# EAGLE board SparkFun-Blynk-Board-ESP8266_Panel_v10a (EAGLE 7.5.0), part 1 of 7
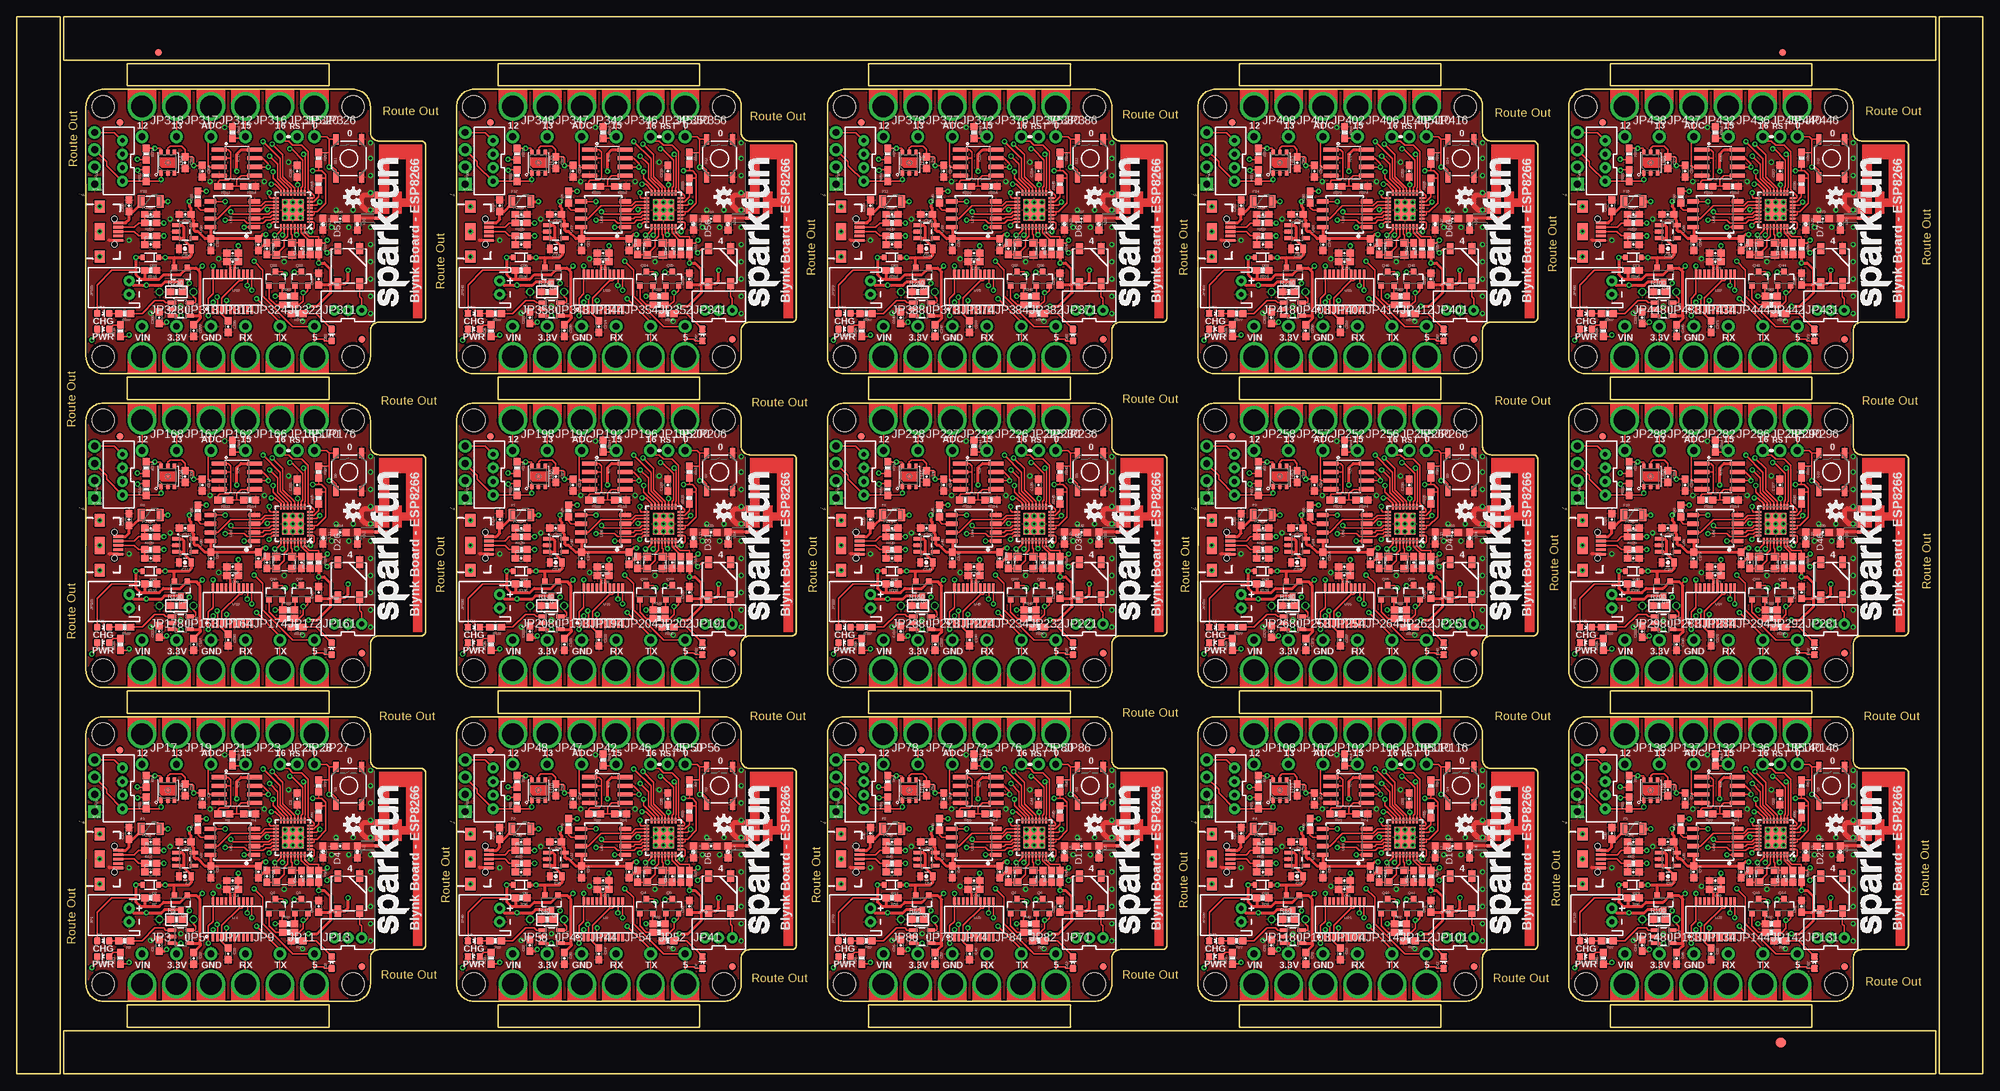
[diagram p0: board, top side]
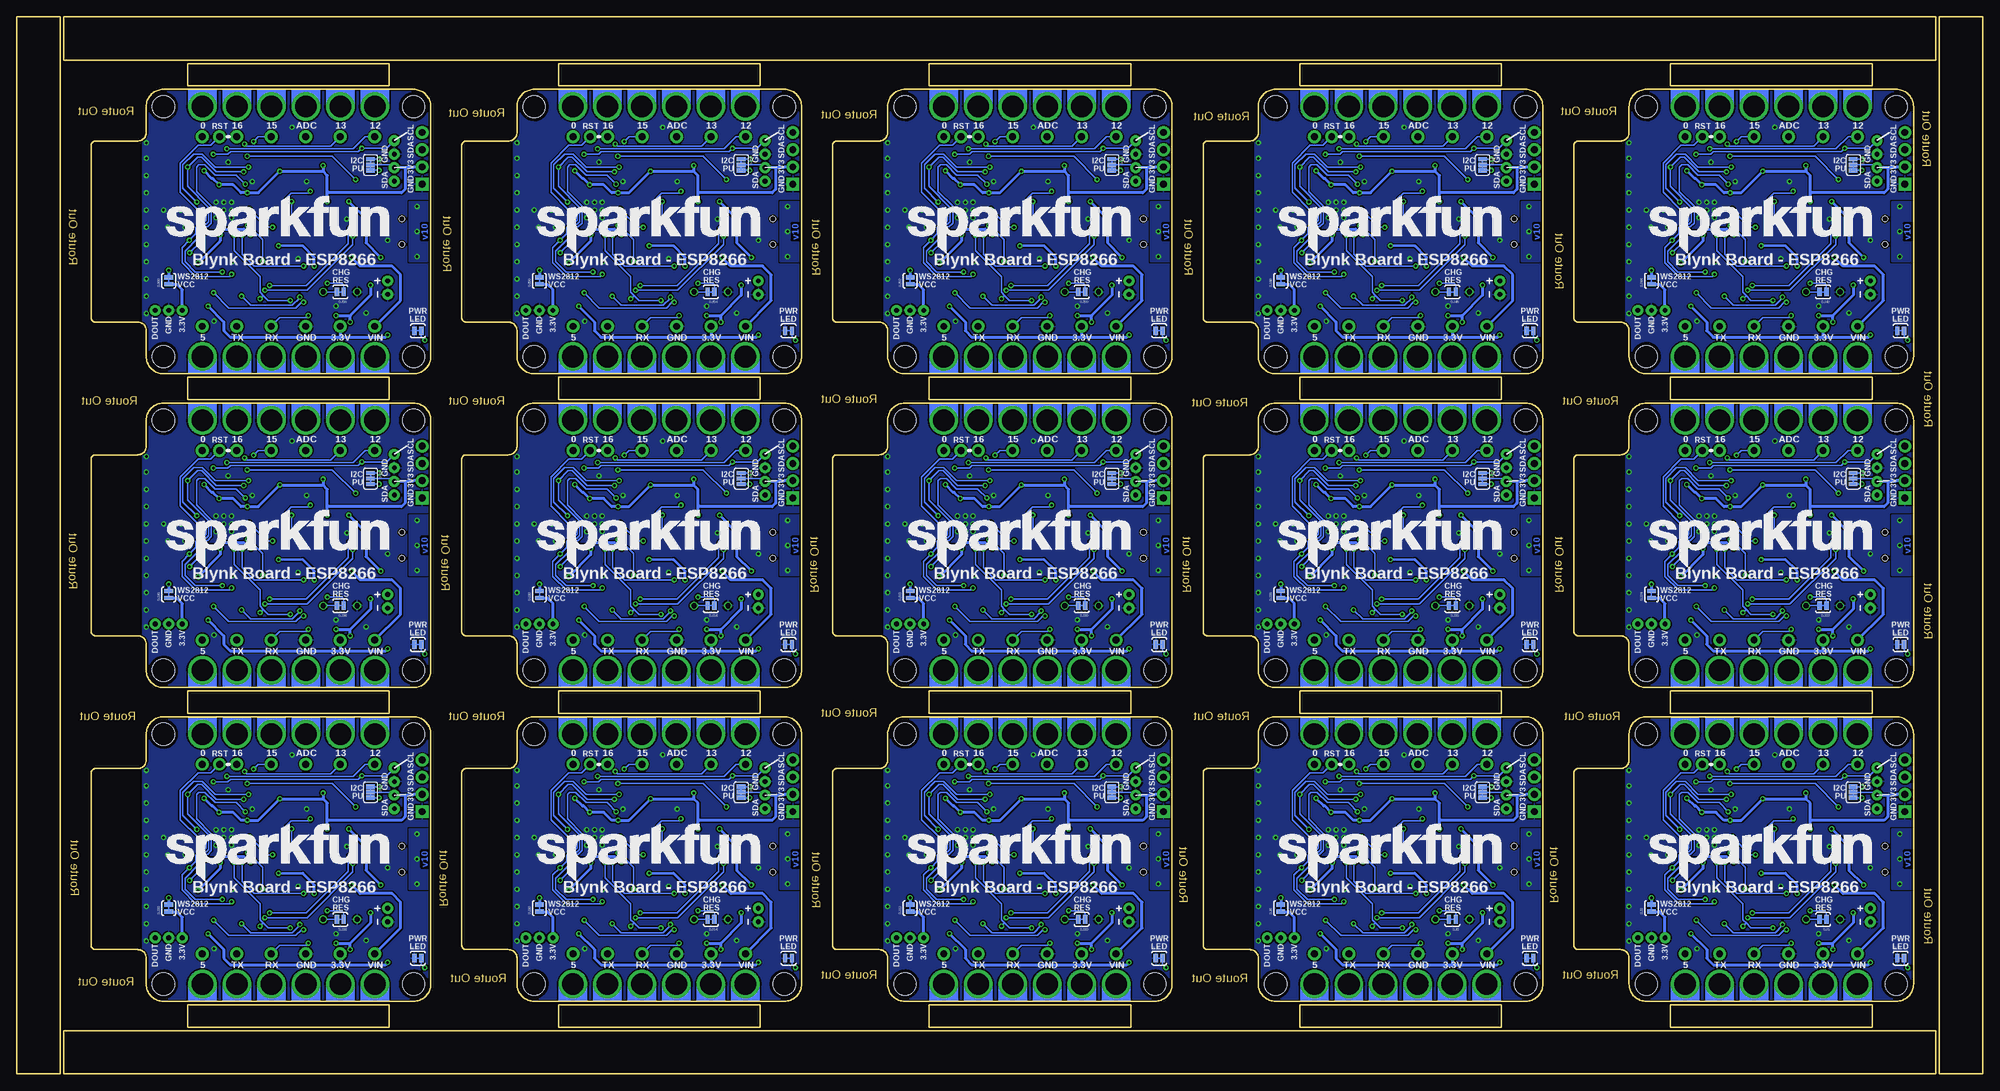
[diagram p1: board, bottom side, seen from below]

Size 289.56 x 155.7 mm. Coordinates in mm from the lower left corner, seen from the top.
Outline: 344 segments
Copper layers (1*16): Top 0.035mm / dielectric 1.5mm / Bottom 0.035mm
Design rules "SparkFun-2-layer-TIGHT": minimum track width 7mil, minimum drill 15mil, track to track 7mil, track to pad 7mil, pad to pad 7mil, via to via 7mil, smd to smd 7mil, copper to edge 7mil, drill to drill 7mil, minimum pad ring 7mil, minimum via ring 7mil, stop-mask expansion 4mil, vias tented up to drill 20mil, thermal gap 10mil

## Footprints (pad centres in the part's own frame; a part is rotated, then mirrored left to right if it is on the bottom)
0603-CAP = smd 1.1 x 1: 1 -0.85,0; 2 0.85,0
0805-CAP = smd 0.8 x 1.2: 1 -0.9,0; 2 0.9,0
LED-0603 = smd 1 x 1: A 0,-0.877; C 0,0.877
SOD-323 = smd 0.63 x 0.83: A 1.15,0; C -1.15,0
WS2812B = smd 1.651 x 1: 1 -2.577,1.6; 2 -2.577,-1.6; 3 2.577,-1.6; 4 2.577,1.6
TRACE_ANTENNA_2.4GHZ_25.7MM = smd 0.46 x 0.46: ANT 0,0.23 | smd 1 x 0.46: GND -1.18,0.23; GND2 -3.38,0.23
FIDUCIAL-1.5X3 = smd 1.5 x 1.5: 1 0,0
FIDUCIAL-1X2 = smd 1 x 1: 1 0,0
PTC-1206 = smd 1 x 1.8: 1 -1.4,0; 2 1.4,0
SO08 = smd 0.61 x 2.21: 1 -1.905,-2.616; 2 -0.635,-2.616; 3 0.635,-2.616; 4 1.905,-2.616; 5 1.905,2.616; 6 0.635,2.616; 7 -0.635,2.616; 8 -1.905,2.616
JST-2-PTH = drill 0.7 pad 1.6: 1 -1,0; 2 1,0
1X01_ALLIGATOR_3MM_HALF = drill 3.175: 1@2 0,0
1X01_NO_SILK = drill 1.016 pad 1.88: 1 0,0
JST-3-PTH-VERT = drill 0.7 pad 1.6: 1 -2,-0.55; 2 0,-0.55; 3 2,-0.55
USB-B-MICRO-SMD_V03 = smd 1.45 x 0.4: D+ 2.725,0; D- 2.725,0.65; GND 2.725,-1.3; ID 2.725,-0.65; VBUS 2.725,1.3 | smd 1.5 x 1.8: SHIELD1 0,3.685; SHIELD2 0,-3.685 | smd 1.5 x 2.5: SHIELD3 0,0 | hole 0.85: 2.2,1.9; 2.2,-1.9
JST-4-PTH-VERT = drill 0.7 pad 1.6: 1 -3,-0.55; 2 -1,-0.55; 3 1,-0.55; 4 3,-0.55
1X04_NO_SILK = drill 1.016 pad 1.88 square: 1 0,0 | drill 1.016 pad 1.88: 2 2.54,0; 3 5.08,0; 4 7.62,0
0603 = smd 1.1 x 1: 1 -0.85,0; 2 0.85,0
SOT23-3 = smd 0.8 x 0.9: 1 -0.95,-1; 2 0.95,-1; 3 0,1.1
SOT23-3@1 = smd 0.8 x 0.9: 1 -0.95,-1; 2 0.95,-1; 3 0,1.1
0603-RES = smd 1.1 x 1: 1 -0.85,0; 2 0.85,0
1/6W-RES = drill 0.762: 1 -2.5,0; 2 2.5,0
0603-RES@1 = smd 1.1 x 1: 1 -0.85,0; 2 0.85,0
TACTILE-SWITCH-SMD = smd 1.524 x 0.762: 1 -2.794,1.905; 2 2.794,1.905; 3 -2.794,-1.905; 4 2.794,-1.905
PAD-JUMPER-2-NC_BY_TRACE_YES_SILK = smd 0.635 x 1.27: 1 -0.508,0; 2 0.508,0
PAD-JUMPER-3-3OF3_NC_BY_TRACE_YES_SILK_FULL_BOX = smd 0.635 x 1.27: 1 -0.813,0; 2 0,0; 3 0.813,0
STAND-OFF = hole 3.302: 0,0
SOT23-5 = smd 0.55 x 1.2: 1 -0.95,-1.3; 2 0,-1.3; 3 0.95,-1.3; 4 0.95,1.3; 5 -0.95,1.3
QFN32 = smd 0.8 x 0.285: 1 -2.5,1.75; 2 -2.5,1.25; 3 -2.5,0.75; 4 -2.5,0.25; 5 -2.5,-0.25; 6 -2.5,-0.75; 7 -2.5,-1.25; 8 -2.5,-1.75; 17 2.5,-1.75; 18 2.5,-1.25; 19 2.5,-0.75; 20 2.5,-0.25; 21 2.5,0.25; 22 2.5,0.75; 23 2.5,1.25; 24 2.5,1.75 | smd 0.285 x 0.8: 9 -1.75,-2.5; 10 -1.25,-2.5; 11 -0.75,-2.5; 12 -0.25,-2.5; 13 0.25,-2.5; 14 0.75,-2.5; 15 1.25,-2.5; 16 1.75,-2.5; 25 1.75,2.5; 26 1.25,2.5; 27 0.75,2.5; 28 0.25,2.5; 29 -0.25,2.5; 30 -0.75,2.5; 31 -1.25,2.5; 32 -1.75,2.5 | smd 3.15 x 3.15: EP 0,0
SSOP20_L = smd 0.381 x 1.143: 1 -2.857,-2.68; 2 -2.223,-2.68; 3 -1.587,-2.68; 4 -0.953,-2.68; 5 -0.318,-2.68; 6 0.318,-2.68; 7 0.953,-2.68; 8 1.587,-2.68; 9 2.223,-2.68; 10 2.857,-2.68; 11 2.857,2.68; 12 2.223,2.68; 13 1.587,2.68; 14 0.953,2.68; 15 0.318,2.68; 16 -0.318,2.68; 17 -0.953,2.68; 18 -1.587,2.68; 19 -2.223,2.68; 20 -2.857,2.68
SOIC-8 = smd 0.61 x 1.702: 1 -1.905,-3.251; 2 -0.635,-3.251; 3 0.635,-3.251; 4 1.905,-3.251; 5 1.905,3.251; 6 0.635,3.251; 7 -0.635,3.251; 8 -1.905,3.251
SI7021 = smd 0.2 x 0.2: 7 0,0 | smd 0.8 x 0.5: DATA 1.5,-1; GND 1.5,0; NC@3 1.5,1; NC@4 -1.5,1; SCK -1.5,-1; VDD -1.5,0
CRYSTAL-SMD-3.2X2.5 = smd 1.2 x 1.1: 1 -1.175,-0.875; 2 1.175,-0.875; 3 1.175,0.875; 4 -1.175,0.875

## Placement (x,y rotation side)
C1  10uF  [0603-CAP]  35.56,29.72 270 top
C2  0.1uF  [0603-CAP]  41.27,40.51 90 top
C3  10pF  [0603-CAP]  36.83,29.08 270 top
C4  10pF  [0603-CAP]  41.91,29.08 90 top
C5  0.1uF  [0603-CAP]  27.3,40.51 270 top
C6  4.7uF  [0603-CAP]  20.95,18.92 90 top
C7  1.0uF  [0805-CAP]  24.77,29.08 180 top
C8  5.6pF  [0603-CAP]  47.62,33.53 0 top
C9  0.1uF  [0603-CAP]  44.45,24.64 90 top
C10  2.2uF  [0603-CAP]  24.77,34.16 180 top
C11  0.1uF  [0603-CAP]  16.51,35.43 90 top
C12  47pF  [0603-CAP]  19.68,34.16 0 top
C13  47pF  [0603-CAP]  19.68,29.72 0 top
C14  0.1uF  [0603-CAP]  31.75,27.18 180 top
C15  4.7uF  [0603-CAP]  31.75,28.45 180 top
C16  0.1uF  [0603-CAP]  31.11,17.65 270 top
C17  0.1uF  [0603-CAP]  28.57,29.72 270 top
C18  0.1uF  [0603-CAP]  24.77,41.78 270 top
C19  4.7uF  [0603-CAP]  26.04,17.02 270 top
C20  10uF  [0603-CAP]  90.17,29.72 270 top
C21  0.1uF  [0603-CAP]  83.19,29.72 270 top
C22  47pF  [0603-CAP]  74.3,29.72 0 top
C23  0.1uF  [0603-CAP]  86.36,27.18 180 top
C24  0.1uF  [0603-CAP]  85.72,17.65 270 top
C25  0.1uF  [0603-CAP]  95.89,40.51 90 top
C26  10pF  [0603-CAP]  91.44,29.08 270 top
C27  10pF  [0603-CAP]  96.52,29.08 90 top
C28  5.6pF  [0603-CAP]  102.23,33.53 0 top
C29  0.1uF  [0603-CAP]  71.12,35.43 90 top
C30  47pF  [0603-CAP]  74.3,34.16 0 top
C31  4.7uF  [0603-CAP]  86.36,28.45 180 top
C32  0.1uF  [0603-CAP]  79.38,41.78 270 top
C33  0.1uF  [0603-CAP]  99.06,24.64 90 top
C34  0.1uF  [0603-CAP]  81.92,40.51 270 top
C35  1.0uF  [0805-CAP]  79.38,29.08 180 top
C36  2.2uF  [0603-CAP]  79.38,34.16 180 top
C37  4.7uF  [0603-CAP]  75.56,18.92 90 top
C38  4.7uF  [0603-CAP]  80.64,17.02 270 top
C39  10uF  [0603-CAP]  144.78,29.72 270 top
C40  0.1uF  [0603-CAP]  137.79,29.72 270 top
C41  47pF  [0603-CAP]  128.91,29.72 0 top
C42  0.1uF  [0603-CAP]  140.97,27.18 180 top
C43  0.1uF  [0603-CAP]  140.34,17.65 270 top
C44  0.1uF  [0603-CAP]  150.5,40.51 90 top
C45  10pF  [0603-CAP]  146.05,29.08 270 top
C46  10pF  [0603-CAP]  151.13,29.08 90 top
C47  5.6pF  [0603-CAP]  156.84,33.53 0 top
C48  0.1uF  [0603-CAP]  125.73,35.43 90 top
C49  47pF  [0603-CAP]  128.91,34.16 0 top
C50  4.7uF  [0603-CAP]  140.97,28.45 180 top
C51  0.1uF  [0603-CAP]  133.99,41.78 270 top
C52  0.1uF  [0603-CAP]  153.67,24.64 90 top
C53  0.1uF  [0603-CAP]  136.53,40.51 270 top
C54  1.0uF  [0805-CAP]  133.99,29.08 180 top
C55  2.2uF  [0603-CAP]  133.99,34.16 180 top
C56  4.7uF  [0603-CAP]  130.18,18.92 90 top
C57  4.7uF  [0603-CAP]  135.25,17.02 270 top
C58  10uF  [0603-CAP]  199.39,29.72 270 top
C59  0.1uF  [0603-CAP]  192.41,29.72 270 top
C60  47pF  [0603-CAP]  183.51,29.72 0 top
C61  0.1uF  [0603-CAP]  195.58,27.18 180 top
C62  0.1uF  [0603-CAP]  194.94,17.65 270 top
C63  0.1uF  [0603-CAP]  205.1,40.51 90 top
C64  10pF  [0603-CAP]  200.66,29.08 270 top
C65  10pF  [0603-CAP]  205.74,29.08 90 top
C66  5.6pF  [0603-CAP]  211.46,33.53 0 top
C67  0.1uF  [0603-CAP]  180.34,35.43 90 top
C68  47pF  [0603-CAP]  183.51,34.16 0 top
C69  4.7uF  [0603-CAP]  195.58,28.45 180 top
C70  0.1uF  [0603-CAP]  188.59,41.78 270 top
C71  0.1uF  [0603-CAP]  208.28,24.64 90 top
C72  0.1uF  [0603-CAP]  191.13,40.51 270 top
C73  1.0uF  [0805-CAP]  188.59,29.08 180 top
C74  2.2uF  [0603-CAP]  188.59,34.16 180 top
C75  4.7uF  [0603-CAP]  184.78,18.92 90 top
C76  4.7uF  [0603-CAP]  189.87,17.02 270 top
C77  10uF  [0603-CAP]  254,29.72 270 top
C78  0.1uF  [0603-CAP]  247.01,29.72 270 top
C79  47pF  [0603-CAP]  238.12,29.72 0 top
C80  0.1uF  [0603-CAP]  250.19,27.18 180 top
C81  0.1uF  [0603-CAP]  249.56,17.65 270 top
C82  0.1uF  [0603-CAP]  259.71,40.51 90 top
C83  10pF  [0603-CAP]  255.27,29.08 270 top
C84  10pF  [0603-CAP]  260.35,29.08 90 top
C85  5.6pF  [0603-CAP]  266.06,33.53 0 top
C86  0.1uF  [0603-CAP]  234.95,35.43 90 top
C87  47pF  [0603-CAP]  238.12,34.16 0 top
C88  4.7uF  [0603-CAP]  250.19,28.45 180 top
C89  0.1uF  [0603-CAP]  243.21,41.78 270 top
C90  0.1uF  [0603-CAP]  262.89,24.64 90 top
C91  0.1uF  [0603-CAP]  245.75,40.51 270 top
C92  1.0uF  [0805-CAP]  243.21,29.08 180 top
C93  2.2uF  [0603-CAP]  243.21,34.16 180 top
C94  4.7uF  [0603-CAP]  239.4,18.92 90 top
C95  4.7uF  [0603-CAP]  244.47,17.02 270 top
C96  10uF  [0603-CAP]  35.56,75.95 270 top
C97  0.1uF  [0603-CAP]  28.57,75.95 270 top
C98  47pF  [0603-CAP]  19.68,75.95 0 top
C99  0.1uF  [0603-CAP]  31.75,73.41 180 top
C100  0.1uF  [0603-CAP]  31.11,63.88 270 top
C101  0.1uF  [0603-CAP]  41.27,86.74 90 top
C102  10pF  [0603-CAP]  36.83,75.31 270 top
C103  10pF  [0603-CAP]  41.91,75.31 90 top
C104  5.6pF  [0603-CAP]  47.62,79.76 0 top
C105  0.1uF  [0603-CAP]  16.51,81.66 90 top
C106  47pF  [0603-CAP]  19.68,80.39 0 top
C107  4.7uF  [0603-CAP]  31.75,74.68 180 top
C108  0.1uF  [0603-CAP]  24.77,88.01 270 top
C109  0.1uF  [0603-CAP]  44.45,70.87 90 top
C110  0.1uF  [0603-CAP]  27.3,86.74 270 top
C111  1.0uF  [0805-CAP]  24.77,75.31 180 top
C112  2.2uF  [0603-CAP]  24.77,80.39 180 top
C113  4.7uF  [0603-CAP]  20.95,65.15 90 top
C114  4.7uF  [0603-CAP]  26.04,63.25 270 top
C115  10uF  [0603-CAP]  90.17,75.95 270 top
C116  0.1uF  [0603-CAP]  83.19,75.95 270 top
C117  47pF  [0603-CAP]  74.3,75.95 0 top
C118  0.1uF  [0603-CAP]  86.36,73.41 180 top
C119  0.1uF  [0603-CAP]  85.72,63.88 270 top
C120  0.1uF  [0603-CAP]  95.89,86.74 90 top
C121  10pF  [0603-CAP]  91.44,75.31 270 top
C122  10pF  [0603-CAP]  96.52,75.31 90 top
C123  5.6pF  [0603-CAP]  102.23,79.76 0 top
C124  0.1uF  [0603-CAP]  71.12,81.66 90 top
C125  47pF  [0603-CAP]  74.3,80.39 0 top
C126  4.7uF  [0603-CAP]  86.36,74.68 180 top
C127  0.1uF  [0603-CAP]  79.38,88.01 270 top
C128  0.1uF  [0603-CAP]  99.06,70.87 90 top
C129  0.1uF  [0603-CAP]  81.92,86.74 270 top
C130  1.0uF  [0805-CAP]  79.38,75.31 180 top
C131  2.2uF  [0603-CAP]  79.38,80.39 180 top
C132  4.7uF  [0603-CAP]  75.56,65.15 90 top
C133  4.7uF  [0603-CAP]  80.64,63.25 270 top
C134  10uF  [0603-CAP]  144.78,75.95 270 top
C135  0.1uF  [0603-CAP]  137.79,75.95 270 top
C136  47pF  [0603-CAP]  128.91,75.95 0 top
C137  0.1uF  [0603-CAP]  140.97,73.41 180 top
C138  0.1uF  [0603-CAP]  140.34,63.88 270 top
C139  0.1uF  [0603-CAP]  150.5,86.74 90 top
C140  10pF  [0603-CAP]  146.05,75.31 270 top
C141  10pF  [0603-CAP]  151.13,75.31 90 top
C142  5.6pF  [0603-CAP]  156.84,79.76 0 top
C143  0.1uF  [0603-CAP]  125.73,81.66 90 top
C144  47pF  [0603-CAP]  128.91,80.39 0 top
C145  4.7uF  [0603-CAP]  140.97,74.68 180 top
C146  0.1uF  [0603-CAP]  133.99,88.01 270 top
C147  0.1uF  [0603-CAP]  153.67,70.87 90 top
C148  0.1uF  [0603-CAP]  136.53,86.74 270 top
C149  1.0uF  [0805-CAP]  133.99,75.31 180 top
C150  2.2uF  [0603-CAP]  133.99,80.39 180 top
C151  4.7uF  [0603-CAP]  130.18,65.15 90 top
C152  4.7uF  [0603-CAP]  135.25,63.25 270 top
C153  10uF  [0603-CAP]  199.39,75.95 270 top
C154  0.1uF  [0603-CAP]  192.41,75.95 270 top
C155  47pF  [0603-CAP]  183.51,75.95 0 top
C156  0.1uF  [0603-CAP]  195.58,73.41 180 top
C157  0.1uF  [0603-CAP]  194.94,63.88 270 top
C158  0.1uF  [0603-CAP]  205.1,86.74 90 top
C159  10pF  [0603-CAP]  200.66,75.31 270 top
C160  10pF  [0603-CAP]  205.74,75.31 90 top
C161  5.6pF  [0603-CAP]  211.46,79.76 0 top
C162  0.1uF  [0603-CAP]  180.34,81.66 90 top
C163  47pF  [0603-CAP]  183.51,80.39 0 top
C164  4.7uF  [0603-CAP]  195.58,74.68 180 top
C165  0.1uF  [0603-CAP]  188.59,88.01 270 top
C166  0.1uF  [0603-CAP]  208.28,70.87 90 top
C167  0.1uF  [0603-CAP]  191.13,86.74 270 top
C168  1.0uF  [0805-CAP]  188.59,75.31 180 top
C169  2.2uF  [0603-CAP]  188.59,80.39 180 top
C170  4.7uF  [0603-CAP]  184.78,65.15 90 top
C171  4.7uF  [0603-CAP]  189.87,63.25 270 top
C172  10uF  [0603-CAP]  254,75.95 270 top
C173  0.1uF  [0603-CAP]  247.01,75.95 270 top
C174  47pF  [0603-CAP]  238.12,75.95 0 top
C175  0.1uF  [0603-CAP]  250.19,73.41 180 top
C176  0.1uF  [0603-CAP]  249.56,63.88 270 top
C177  0.1uF  [0603-CAP]  259.71,86.74 90 top
C178  10pF  [0603-CAP]  255.27,75.31 270 top
C179  10pF  [0603-CAP]  260.35,75.31 90 top
C180  5.6pF  [0603-CAP]  266.06,79.76 0 top
C181  0.1uF  [0603-CAP]  234.95,81.66 90 top
C182  47pF  [0603-CAP]  238.12,80.39 0 top
C183  4.7uF  [0603-CAP]  250.19,74.68 180 top
C184  0.1uF  [0603-CAP]  243.21,88.01 270 top
C185  0.1uF  [0603-CAP]  262.89,70.87 90 top
C186  0.1uF  [0603-CAP]  245.75,86.74 270 top
C187  1.0uF  [0805-CAP]  243.21,75.31 180 top
C188  2.2uF  [0603-CAP]  243.21,80.39 180 top
C189  4.7uF  [0603-CAP]  239.4,65.15 90 top
C190  4.7uF  [0603-CAP]  244.47,63.25 270 top
C191  10uF  [0603-CAP]  35.56,122.17 270 top
C192  0.1uF  [0603-CAP]  28.57,122.17 270 top
C193  47pF  [0603-CAP]  19.68,122.17 0 top
C194  0.1uF  [0603-CAP]  31.75,119.63 180 top
C195  0.1uF  [0603-CAP]  31.11,110.11 270 top
C196  0.1uF  [0603-CAP]  41.27,132.97 90 top
C197  10pF  [0603-CAP]  36.83,121.54 270 top
C198  10pF  [0603-CAP]  41.91,121.54 90 top
C199  5.6pF  [0603-CAP]  47.62,125.98 0 top
C200  0.1uF  [0603-CAP]  16.51,127.89 90 top
C201  47pF  [0603-CAP]  19.68,126.62 0 top
C202  4.7uF  [0603-CAP]  31.75,120.9 180 top
C203  0.1uF  [0603-CAP]  24.77,134.24 270 top
C204  0.1uF  [0603-CAP]  44.45,117.09 90 top
C205  0.1uF  [0603-CAP]  27.3,132.97 270 top
C206  1.0uF  [0805-CAP]  24.77,121.54 180 top
C207  2.2uF  [0603-CAP]  24.77,126.62 180 top
C208  4.7uF  [0603-CAP]  20.95,111.38 90 top
C209  4.7uF  [0603-CAP]  26.04,109.47 270 top
C210  10uF  [0603-CAP]  90.17,122.17 270 top
C211  0.1uF  [0603-CAP]  83.19,122.17 270 top
C212  47pF  [0603-CAP]  74.3,122.17 0 top
C213  0.1uF  [0603-CAP]  86.36,119.63 180 top
C214  0.1uF  [0603-CAP]  85.72,110.11 270 top
C215  0.1uF  [0603-CAP]  95.89,132.97 90 top
C216  10pF  [0603-CAP]  91.44,121.54 270 top
C217  10pF  [0603-CAP]  96.52,121.54 90 top
C218  5.6pF  [0603-CAP]  102.23,125.98 0 top
C219  0.1uF  [0603-CAP]  71.12,127.89 90 top
C220  47pF  [0603-CAP]  74.3,126.62 0 top
C221  4.7uF  [0603-CAP]  86.36,120.9 180 top
C222  0.1uF  [0603-CAP]  79.38,134.24 270 top
C223  0.1uF  [0603-CAP]  99.06,117.09 90 top
C224  0.1uF  [0603-CAP]  81.92,132.97 270 top
C225  1.0uF  [0805-CAP]  79.38,121.54 180 top
C226  2.2uF  [0603-CAP]  79.38,126.62 180 top
C227  4.7uF  [0603-CAP]  75.56,111.38 90 top
C228  4.7uF  [0603-CAP]  80.64,109.47 270 top
C229  10uF  [0603-CAP]  144.78,122.17 270 top
C230  0.1uF  [0603-CAP]  137.79,122.17 270 top
C231  47pF  [0603-CAP]  128.91,122.17 0 top
C232  0.1uF  [0603-CAP]  140.97,119.63 180 top
C233  0.1uF  [0603-CAP]  140.34,110.11 270 top
C234  0.1uF  [0603-CAP]  150.5,132.97 90 top
C235  10pF  [0603-CAP]  146.05,121.54 270 top
C236  10pF  [0603-CAP]  151.13,121.54 90 top
C237  5.6pF  [0603-CAP]  156.84,125.98 0 top
C238  0.1uF  [0603-CAP]  125.73,127.89 90 top
C239  47pF  [0603-CAP]  128.91,126.62 0 top
C240  4.7uF  [0603-CAP]  140.97,120.9 180 top
C241  0.1uF  [0603-CAP]  133.99,134.24 270 top
C242  0.1uF  [0603-CAP]  153.67,117.09 90 top
C243  0.1uF  [0603-CAP]  136.53,132.97 270 top
C244  1.0uF  [0805-CAP]  133.99,121.54 180 top
C245  2.2uF  [0603-CAP]  133.99,126.62 180 top
C246  4.7uF  [0603-CAP]  130.18,111.38 90 top
C247  4.7uF  [0603-CAP]  135.25,109.47 270 top
C248  10uF  [0603-CAP]  199.39,122.17 270 top
C249  0.1uF  [0603-CAP]  192.41,122.17 270 top
C250  47pF  [0603-CAP]  183.51,122.17 0 top
C251  0.1uF  [0603-CAP]  195.58,119.63 180 top
C252  0.1uF  [0603-CAP]  194.94,110.11 270 top
C253  0.1uF  [0603-CAP]  205.1,132.97 90 top
C254  10pF  [0603-CAP]  200.66,121.54 270 top
C255  10pF  [0603-CAP]  205.74,121.54 90 top
C256  5.6pF  [0603-CAP]  211.46,125.98 0 top
C257  0.1uF  [0603-CAP]  180.34,127.89 90 top
C258  47pF  [0603-CAP]  183.51,126.62 0 top
C259  4.7uF  [0603-CAP]  195.58,120.9 180 top
C260  0.1uF  [0603-CAP]  188.59,134.24 270 top
C261  0.1uF  [0603-CAP]  208.28,117.09 90 top
C262  0.1uF  [0603-CAP]  191.13,132.97 270 top
C263  1.0uF  [0805-CAP]  188.59,121.54 180 top
C264  2.2uF  [0603-CAP]  188.59,126.62 180 top
C265  4.7uF  [0603-CAP]  184.78,111.38 90 top
C266  4.7uF  [0603-CAP]  189.87,109.47 270 top
C267  10uF  [0603-CAP]  254,122.17 270 top
C268  0.1uF  [0603-CAP]  247.01,122.17 270 top
C269  47pF  [0603-CAP]  238.12,122.17 0 top
C270  0.1uF  [0603-CAP]  250.19,119.63 180 top
C271  0.1uF  [0603-CAP]  249.56,110.11 270 top
C272  0.1uF  [0603-CAP]  259.71,132.97 90 top
C273  10pF  [0603-CAP]  255.27,121.54 270 top
C274  10pF  [0603-CAP]  260.35,121.54 90 top
C275  5.6pF  [0603-CAP]  266.06,125.98 0 top
C276  0.1uF  [0603-CAP]  234.95,127.89 90 top
C277  47pF  [0603-CAP]  238.12,126.62 0 top
C278  4.7uF  [0603-CAP]  250.19,120.9 180 top
C279  0.1uF  [0603-CAP]  243.21,134.24 270 top
C280  0.1uF  [0603-CAP]  262.89,117.09 90 top
C281  0.1uF  [0603-CAP]  245.75,132.97 270 top
C282  1.0uF  [0805-CAP]  243.21,121.54 180 top
C283  2.2uF  [0603-CAP]  243.21,126.62 180 top
C284  4.7uF  [0603-CAP]  239.4,111.38 90 top
C285  4.7uF  [0603-CAP]  244.47,109.47 270 top
D1  Yellow  [LED-0603]  12.7,19.56 270 top
D2  BAT20J  [SOD-323]  19.68,27.81 180 top
D3  BLUE  [LED-0603]  46.35,16.38 0 top
D4  WS2812  [WS2812B]  48.9,26.54 90 top
D5  RED  [LED-0603]  12.7,17.27 90 top
D6  WS2812  [WS2812B]  103.5,26.54 90 top
D7  BLUE  [LED-0603]  100.97,16.38 0 top
D8  BAT20J  [SOD-323]  74.3,27.81 180 top
D9  Yellow  [LED-0603]  67.31,19.56 270 top
D10  RED  [LED-0603]  67.31,17.27 90 top
D11  WS2812  [WS2812B]  158.12,26.54 90 top
D12  BLUE  [LED-0603]  155.57,16.38 0 top
D13  BAT20J  [SOD-323]  128.91,27.81 180 top
D14  Yellow  [LED-0603]  121.92,19.56 270 top
D15  RED  [LED-0603]  121.92,17.27 90 top
D16  WS2812  [WS2812B]  212.72,26.54 90 top
D17  BLUE  [LED-0603]  210.19,16.38 0 top
D18  BAT20J  [SOD-323]  183.51,27.81 180 top
D19  Yellow  [LED-0603]  176.53,19.56 270 top
D20  RED  [LED-0603]  176.53,17.27 90 top
D21  WS2812  [WS2812B]  267.33,26.54 90 top
D22  BLUE  [LED-0603]  264.8,16.38 0 top
D23  BAT20J  [SOD-323]  238.12,27.81 180 top
D24  Yellow  [LED-0603]  231.14,19.56 270 top
D25  RED  [LED-0603]  231.14,17.27 90 top
D26  WS2812  [WS2812B]  48.9,72.77 90 top
D27  BLUE  [LED-0603]  46.35,62.61 0 top
D28  BAT20J  [SOD-323]  19.68,74.04 180 top
D29  Yellow  [LED-0603]  12.7,65.79 270 top
D30  RED  [LED-0603]  12.7,63.5 90 top
D31  WS2812  [WS2812B]  103.5,72.77 90 top
D32  BLUE  [LED-0603]  100.97,62.61 0 top
D33  BAT20J  [SOD-323]  74.3,74.04 180 top
D34  Yellow  [LED-0603]  67.31,65.79 270 top
D35  RED  [LED-0603]  67.31,63.5 90 top
D36  WS2812  [WS2812B]  158.12,72.77 90 top
D37  BLUE  [LED-0603]  155.57,62.61 0 top
D38  BAT20J  [SOD-323]  128.91,74.04 180 top
D39  Yellow  [LED-0603]  121.92,65.79 270 top
D40  RED  [LED-0603]  121.92,63.5 90 top
D41  WS2812  [WS2812B]  212.72,72.77 90 top
D42  BLUE  [LED-0603]  210.19,62.61 0 top
D43  BAT20J  [SOD-323]  183.51,74.04 180 top
D44  Yellow  [LED-0603]  176.53,65.79 270 top
D45  RED  [LED-0603]  176.53,63.5 90 top
D46  WS2812  [WS2812B]  267.33,72.77 90 top
D47  BLUE  [LED-0603]  264.8,62.61 0 top
D48  BAT20J  [SOD-323]  238.12,74.04 180 top
D49  Yellow  [LED-0603]  231.14,65.79 270 top
D50  RED  [LED-0603]  231.14,63.5 90 top
D51  WS2812  [WS2812B]  48.9,119 90 top
D52  BLUE  [LED-0603]  46.35,108.84 0 top
D53  BAT20J  [SOD-323]  19.68,120.27 180 top
D54  Yellow  [LED-0603]  12.7,112.01 270 top
D55  RED  [LED-0603]  12.7,109.73 90 top
D56  WS2812  [WS2812B]  103.5,119 90 top
D57  BLUE  [LED-0603]  100.97,108.84 0 top
D58  BAT20J  [SOD-323]  74.3,120.27 180 top
D59  Yellow  [LED-0603]  67.31,112.01 270 top
D60  RED  [LED-0603]  67.31,109.73 90 top
D61  WS2812  [WS2812B]  158.12,119 90 top
D62  BLUE  [LED-0603]  155.57,108.84 0 top
D63  BAT20J  [SOD-323]  128.91,120.27 180 top
D64  Yellow  [LED-0603]  121.92,112.01 270 top
D65  RED  [LED-0603]  121.92,109.73 90 top
D66  WS2812  [WS2812B]  212.72,119 90 top
D67  BLUE  [LED-0603]  210.19,108.84 0 top
D68  BAT20J  [SOD-323]  183.51,120.27 180 top
D69  Yellow  [LED-0603]  176.53,112.01 270 top
D70  RED  [LED-0603]  176.53,109.73 90 top
D71  WS2812  [WS2812B]  267.33,119 90 top
D72  BLUE  [LED-0603]  264.8,108.84 0 top
D73  BAT20J  [SOD-323]  238.12,120.27 180 top
D74  Yellow  [LED-0603]  231.14,112.01 270 top
D75  RED  [LED-0603]  231.14,109.73 90 top
E1  ANTENNATRACE  [TRACE_ANTENNA_2.4GHZ_25.7MM]  52.7,33.59 270 top
E2  ANTENNATRACE  [TRACE_ANTENNA_2.4GHZ_25.7MM]  107.31,33.59 270 top
E3  ANTENNATRACE  [TRACE_ANTENNA_2.4GHZ_25.7MM]  161.93,33.59 270 top
E4  ANTENNATRACE  [TRACE_ANTENNA_2.4GHZ_25.7MM]  216.53,33.59 270 top
E5  ANTENNATRACE  [TRACE_ANTENNA_2.4GHZ_25.7MM]  271.14,33.59 270 top
E6  ANTENNATRACE  [TRACE_ANTENNA_2.4GHZ_25.7MM]  52.7,79.82 270 top
E7  ANTENNATRACE  [TRACE_ANTENNA_2.4GHZ_25.7MM]  107.31,79.82 270 top
E8  ANTENNATRACE  [TRACE_ANTENNA_2.4GHZ_25.7MM]  161.93,79.82 270 top
E9  ANTENNATRACE  [TRACE_ANTENNA_2.4GHZ_25.7MM]  216.53,79.82 270 top
E10  ANTENNATRACE  [TRACE_ANTENNA_2.4GHZ_25.7MM]  271.14,79.82 270 top
E11  ANTENNATRACE  [TRACE_ANTENNA_2.4GHZ_25.7MM]  52.7,126.05 270 top
E12  ANTENNATRACE  [TRACE_ANTENNA_2.4GHZ_25.7MM]  107.31,126.05 270 top
E13  ANTENNATRACE  [TRACE_ANTENNA_2.4GHZ_25.7MM]  161.93,126.05 270 top
E14  ANTENNATRACE  [TRACE_ANTENNA_2.4GHZ_25.7MM]  216.53,126.05 270 top
E15  ANTENNATRACE  [TRACE_ANTENNA_2.4GHZ_25.7MM]  271.14,126.05 270 top
E$1  [FIDUCIAL-1.5X3]  259.84,4.57 0 top
E$7  [FIDUCIAL-1X2]  260.1,150.5 90 top
E$8  [FIDUCIAL-1X2]  20.83,150.5 270 top
F1  500mA  [PTC-1206]  19.68,36.07 0 top
F2  500mA  [PTC-1206]  74.3,36.07 0 top
F3  500mA  [PTC-1206]  128.91,36.07 0 top
F4  500mA  [PTC-1206]  183.51,36.07 0 top
F5  500mA  [PTC-1206]  238.12,36.07 0 top
F6  500mA  [PTC-1206]  19.68,82.3 0 top
F7  500mA  [PTC-1206]  74.3,82.3 0 top
F8  500mA  [PTC-1206]  128.91,82.3 0 top
F9  500mA  [PTC-1206]  183.51,82.3 0 top
F10  500mA  [PTC-1206]  238.12,82.3 0 top
F11  500mA  [PTC-1206]  19.68,128.52 0 top
F12  500mA  [PTC-1206]  74.3,128.52 0 top
F13  500mA  [PTC-1206]  128.91,128.52 0 top
F14  500mA  [PTC-1206]  183.51,128.52 0 top
F15  500mA  [PTC-1206]  238.12,128.52 0 top
FID1  FIDUCIAL1X2  [FIDUCIAL-1X2]  50.8,15.75 0 top
FID2  FIDUCIAL1X2  [FIDUCIAL-1X2]  15.16,47.67 0 top
FID3  FIDUCIAL1X2  [FIDUCIAL-1X2]  105.41,15.75 0 top
FID4  FIDUCIAL1X2  [FIDUCIAL-1X2]  69.77,47.67 0 top
FID5  FIDUCIAL1X2  [FIDUCIAL-1X2]  160.02,15.75 0 top
FID6  FIDUCIAL1X2  [FIDUCIAL-1X2]  124.38,47.67 0 top
FID7  FIDUCIAL1X2  [FIDUCIAL-1X2]  214.63,15.75 0 top
FID8  FIDUCIAL1X2  [FIDUCIAL-1X2]  178.99,47.67 0 top
FID9  FIDUCIAL1X2  [FIDUCIAL-1X2]  269.24,15.75 0 top
FID10  FIDUCIAL1X2  [FIDUCIAL-1X2]  233.6,47.67 0 top
FID11  FIDUCIAL1X2  [FIDUCIAL-1X2]  50.8,61.98 0 top
FID12  FIDUCIAL1X2  [FIDUCIAL-1X2]  15.16,93.9 0 top
FID13  FIDUCIAL1X2  [FIDUCIAL-1X2]  105.41,61.98 0 top
FID14  FIDUCIAL1X2  [FIDUCIAL-1X2]  69.77,93.9 0 top
FID15  FIDUCIAL1X2  [FIDUCIAL-1X2]  160.02,61.98 0 top
FID16  FIDUCIAL1X2  [FIDUCIAL-1X2]  124.38,93.9 0 top
FID17  FIDUCIAL1X2  [FIDUCIAL-1X2]  214.63,61.98 0 top
FID18  FIDUCIAL1X2  [FIDUCIAL-1X2]  178.99,93.9 0 top
FID19  FIDUCIAL1X2  [FIDUCIAL-1X2]  269.24,61.98 0 top
FID20  FIDUCIAL1X2  [FIDUCIAL-1X2]  233.6,93.9 0 top
FID21  FIDUCIAL1X2  [FIDUCIAL-1X2]  50.8,108.2 0 top
FID22  FIDUCIAL1X2  [FIDUCIAL-1X2]  15.16,140.12 0 top
FID23  FIDUCIAL1X2  [FIDUCIAL-1X2]  105.41,108.2 0 top
FID24  FIDUCIAL1X2  [FIDUCIAL-1X2]  69.77,140.12 0 top
FID25  FIDUCIAL1X2  [FIDUCIAL-1X2]  160.02,108.2 0 top
FID26  FIDUCIAL1X2  [FIDUCIAL-1X2]  124.38,140.12 0 top
FID27  FIDUCIAL1X2  [FIDUCIAL-1X2]  214.63,108.2 0 top
FID28  FIDUCIAL1X2  [FIDUCIAL-1X2]  178.99,140.12 0 top
FID29  FIDUCIAL1X2  [FIDUCIAL-1X2]  269.24,108.2 0 top
FID30  FIDUCIAL1X2  [FIDUCIAL-1X2]  233.6,140.12 0 top
IC1  LMV358  [SO08]  32.38,41.78 270 top
IC2  LMV358  [SO08]  87,41.78 270 top
IC3  LMV358  [SO08]  141.6,41.78 270 top
IC4  LMV358  [SO08]  196.22,41.78 270 top
IC5  LMV358  [SO08]  250.82,41.78 270 top
IC6  LMV358  [SO08]  32.38,88.01 270 top
IC7  LMV358  [SO08]  87,88.01 270 top
IC8  LMV358  [SO08]  141.6,88.01 270 top
IC9  LMV358  [SO08]  196.22,88.01 270 top
IC10  LMV358  [SO08]  250.82,88.01 270 top
IC11  LMV358  [SO08]  32.38,134.24 270 top
IC12  LMV358  [SO08]  87,134.24 270 top
IC13  LMV358  [SO08]  141.6,134.24 270 top
IC14  LMV358  [SO08]  196.22,134.24 270 top
IC15  LMV358  [SO08]  250.82,134.24 270 top
JP1  LiPo  [JST-2-PTH]  16.51,23.37 90 top
JP2  [1X01_ALLIGATOR_3MM_HALF]  18.41,13.21 180 top
JP3  [1X01_NO_SILK]  18.41,17.65 0 top
JP4  [1X01_ALLIGATOR_3MM_HALF]  23.5,13.21 180 top
JP5  [1X01_NO_SILK]  23.5,17.65 0 top
JP6  [1X01_ALLIGATOR_3MM_HALF]  28.57,13.21 180 top
JP7  [1X01_NO_SILK]  28.57,17.65 0 top
JP8  [1X01_ALLIGATOR_3MM_HALF]  33.66,13.21 180 top
JP9  [1X01_NO_SILK]  33.66,17.65 0 top
JP10  [1X01_ALLIGATOR_3MM_HALF]  38.73,13.21 180 top
JP11  [1X01_NO_SILK]  38.73,17.65 0 top
JP12  [1X01_ALLIGATOR_3MM_HALF]  43.81,13.21 180 top
JP13  [1X01_NO_SILK]  43.81,17.65 0 top
JP14  [JST-3-PTH-VERT]  48.77,20.57 0 top
JP15  [USB-B-MICRO-SMD_V03]  12.19,31.62 0 top
JP16  [1X01_ALLIGATOR_3MM_HALF]  18.41,50.04 0 top
JP17  [1X01_NO_SILK]  18.41,45.59 0 top
JP18  [1X01_ALLIGATOR_3MM_HALF]  23.5,50.04 0 top
JP19  [1X01_NO_SILK]  23.5,45.59 0 top
JP20  [1X01_ALLIGATOR_3MM_HALF]  28.57,50.04 0 top
JP21  [1X01_NO_SILK]  28.57,45.59 0 top
JP22  [1X01_ALLIGATOR_3MM_HALF]  33.66,50.04 0 top
JP23  [1X01_NO_SILK]  33.66,45.59 0 top
JP24  [1X01_ALLIGATOR_3MM_HALF]  38.73,50.04 0 top
JP25  [1X01_NO_SILK]  38.73,45.59 0 top
JP26  [1X01_ALLIGATOR_3MM_HALF]  43.81,50.04 0 top
JP27  [1X01_NO_SILK]  43.81,45.59 0 top
JP28  [1X01_NO_SILK]  41.27,45.59 0 top
JP29  [JST-4-PTH-VERT]  14.99,42.04 90 top
JP30  [1X04_NO_SILK]  11.43,38.61 90 top
JP31  [USB-B-MICRO-SMD_V03]  66.8,31.62 0 top
JP32  [1X01_ALLIGATOR_3MM_HALF]  73.03,50.04 0 top
JP33  [1X01_ALLIGATOR_3MM_HALF]  78.11,50.04 0 top
JP34  [1X01_ALLIGATOR_3MM_HALF]  88.27,50.04 0 top
JP35  [1X01_ALLIGATOR_3MM_HALF]  93.34,50.04 0 top
JP36  [1X01_ALLIGATOR_3MM_HALF]  98.42,13.21 180 top
JP37  [1X01_ALLIGATOR_3MM_HALF]  83.19,50.04 0 top
JP38  [1X01_ALLIGATOR_3MM_HALF]  78.11,13.21 180 top
JP39  [1X01_ALLIGATOR_3MM_HALF]  83.19,13.21 180 top
JP40  [JST-3-PTH-VERT]  103.38,20.57 0 top
JP41  [1X01_NO_SILK]  98.42,17.65 0 top
JP42  [1X01_NO_SILK]  83.19,45.59 0 top
JP43  [1X01_NO_SILK]  78.11,17.65 0 top
JP44  [1X01_NO_SILK]  83.19,17.65 0 top
JP45  [1X01_NO_SILK]  93.34,45.59 0 top
JP46  [1X01_NO_SILK]  88.27,45.59 0 top
JP47  [1X01_NO_SILK]  78.11,45.59 0 top
JP48  [1X01_NO_SILK]  73.03,45.59 0 top
JP49  LiPo  [JST-2-PTH]  71.12,23.37 90 top
JP50  [1X01_NO_SILK]  95.89,45.59 0 top
JP51  [1X01_ALLIGATOR_3MM_HALF]  93.34,13.21 180 top
JP52  [1X01_NO_SILK]  93.34,17.65 0 top
JP53  [1X01_ALLIGATOR_3MM_HALF]  88.27,13.21 180 top
JP54  [1X01_NO_SILK]  88.27,17.65 0 top
JP55  [1X01_ALLIGATOR_3MM_HALF]  98.42,50.04 0 top
JP56  [1X01_NO_SILK]  98.42,45.59 0 top
JP57  [1X01_ALLIGATOR_3MM_HALF]  73.03,13.21 180 top
JP58  [1X01_NO_SILK]  73.03,17.65 0 top
JP59  [1X04_NO_SILK]  66.04,38.61 90 top
JP60  [JST-4-PTH-VERT]  69.6,42.04 90 top
JP61  [USB-B-MICRO-SMD_V03]  121.41,31.62 0 top
JP62  [1X01_ALLIGATOR_3MM_HALF]  127.64,50.04 0 top
JP63  [1X01_ALLIGATOR_3MM_HALF]  132.72,50.04 0 top
JP64  [1X01_ALLIGATOR_3MM_HALF]  142.88,50.04 0 top
JP65  [1X01_ALLIGATOR_3MM_HALF]  147.96,50.04 0 top
JP66  [1X01_ALLIGATOR_3MM_HALF]  153.03,13.21 180 top
JP67  [1X01_ALLIGATOR_3MM_HALF]  137.79,50.04 0 top
JP68  [1X01_ALLIGATOR_3MM_HALF]  132.72,13.21 180 top
JP69  [1X01_ALLIGATOR_3MM_HALF]  137.79,13.21 180 top
JP70  [JST-3-PTH-VERT]  157.99,20.57 0 top
JP71  [1X01_NO_SILK]  153.03,17.65 0 top
JP72  [1X01_NO_SILK]  137.79,45.59 0 top
JP73  [1X01_NO_SILK]  132.72,17.65 0 top
JP74  [1X01_NO_SILK]  137.79,17.65 0 top
JP75  [1X01_NO_SILK]  147.96,45.59 0 top
JP76  [1X01_NO_SILK]  142.88,45.59 0 top
JP77  [1X01_NO_SILK]  132.72,45.59 0 top
JP78  [1X01_NO_SILK]  127.64,45.59 0 top
JP79  LiPo  [JST-2-PTH]  125.73,23.37 90 top
JP80  [1X01_NO_SILK]  150.5,45.59 0 top
JP81  [1X01_ALLIGATOR_3MM_HALF]  147.96,13.21 180 top
JP82  [1X01_NO_SILK]  147.96,17.65 0 top
JP83  [1X01_ALLIGATOR_3MM_HALF]  142.88,13.21 180 top
JP84  [1X01_NO_SILK]  142.88,17.65 0 top
JP85  [1X01_ALLIGATOR_3MM_HALF]  153.03,50.04 0 top
JP86  [1X01_NO_SILK]  153.03,45.59 0 top
JP87  [1X01_ALLIGATOR_3MM_HALF]  127.64,13.21 180 top
JP88  [1X01_NO_SILK]  127.64,17.65 0 top
JP89  [1X04_NO_SILK]  120.65,38.61 90 top
JP90  [JST-4-PTH-VERT]  124.21,42.04 90 top
JP91  [USB-B-MICRO-SMD_V03]  176.02,31.62 0 top
JP92  [1X01_ALLIGATOR_3MM_HALF]  182.25,50.04 0 top
JP93  [1X01_ALLIGATOR_3MM_HALF]  187.32,50.04 0 top
JP94  [1X01_ALLIGATOR_3MM_HALF]  197.49,50.04 0 top
JP95  [1X01_ALLIGATOR_3MM_HALF]  202.56,50.04 0 top
JP96  [1X01_ALLIGATOR_3MM_HALF]  207.65,13.21 180 top
JP97  [1X01_ALLIGATOR_3MM_HALF]  192.41,50.04 0 top
JP98  [1X01_ALLIGATOR_3MM_HALF]  187.32,13.21 180 top
JP99  [1X01_ALLIGATOR_3MM_HALF]  192.41,13.21 180 top
JP100  [JST-3-PTH-VERT]  212.6,20.57 0 top
JP101  [1X01_NO_SILK]  207.65,17.65 0 top
JP102  [1X01_NO_SILK]  192.41,45.59 0 top
JP103  [1X01_NO_SILK]  187.32,17.65 0 top
JP104  [1X01_NO_SILK]  192.41,17.65 0 top
JP105  [1X01_NO_SILK]  202.56,45.59 0 top
JP106  [1X01_NO_SILK]  197.49,45.59 0 top
JP107  [1X01_NO_SILK]  187.32,45.59 0 top
JP108  [1X01_NO_SILK]  182.25,45.59 0 top
JP109  LiPo  [JST-2-PTH]  180.34,23.37 90 top
JP110  [1X01_NO_SILK]  205.1,45.59 0 top
JP111  [1X01_ALLIGATOR_3MM_HALF]  202.56,13.21 180 top
JP112  [1X01_NO_SILK]  202.56,17.65 0 top
JP113  [1X01_ALLIGATOR_3MM_HALF]  197.49,13.21 180 top
JP114  [1X01_NO_SILK]  197.49,17.65 0 top
JP115  [1X01_ALLIGATOR_3MM_HALF]  207.65,50.04 0 top
JP116  [1X01_NO_SILK]  207.65,45.59 0 top
JP117  [1X01_ALLIGATOR_3MM_HALF]  182.25,13.21 180 top
JP118  [1X01_NO_SILK]  182.25,17.65 0 top
JP119  [1X04_NO_SILK]  175.26,38.61 90 top
JP120  [JST-4-PTH-VERT]  178.82,42.04 90 top
JP121  [USB-B-MICRO-SMD_V03]  230.63,31.62 0 top
JP122  [1X01_ALLIGATOR_3MM_HALF]  236.85,50.04 0 top
JP123  [1X01_ALLIGATOR_3MM_HALF]  241.94,50.04 0 top
JP124  [1X01_ALLIGATOR_3MM_HALF]  252.09,50.04 0 top
JP125  [1X01_ALLIGATOR_3MM_HALF]  257.18,50.04 0 top
JP126  [1X01_ALLIGATOR_3MM_HALF]  262.25,13.21 180 top
JP127  [1X01_ALLIGATOR_3MM_HALF]  247.01,50.04 0 top
JP128  [1X01_ALLIGATOR_3MM_HALF]  241.94,13.21 180 top
JP129  [1X01_ALLIGATOR_3MM_HALF]  247.01,13.21 180 top
JP130  [JST-3-PTH-VERT]  267.21,20.57 0 top
JP131  [1X01_NO_SILK]  262.25,17.65 0 top
JP132  [1X01_NO_SILK]  247.01,45.59 0 top
JP133  [1X01_NO_SILK]  241.94,17.65 0 top
JP134  [1X01_NO_SILK]  247.01,17.65 0 top
JP135  [1X01_NO_SILK]  257.18,45.59 0 top
JP136  [1X01_NO_SILK]  252.09,45.59 0 top
JP137  [1X01_NO_SILK]  241.94,45.59 0 top
JP138  [1X01_NO_SILK]  236.85,45.59 0 top
JP139  LiPo  [JST-2-PTH]  234.95,23.37 90 top
JP140  [1X01_NO_SILK]  259.71,45.59 0 top
JP141  [1X01_ALLIGATOR_3MM_HALF]  257.18,13.21 180 top
JP142  [1X01_NO_SILK]  257.18,17.65 0 top
JP143  [1X01_ALLIGATOR_3MM_HALF]  252.09,13.21 180 top
JP144  [1X01_NO_SILK]  252.09,17.65 0 top
JP145  [1X01_ALLIGATOR_3MM_HALF]  262.25,50.04 0 top
JP146  [1X01_NO_SILK]  262.25,45.59 0 top
JP147  [1X01_ALLIGATOR_3MM_HALF]  236.85,13.21 180 top
JP148  [1X01_NO_SILK]  236.85,17.65 0 top
JP149  [1X04_NO_SILK]  229.87,38.61 90 top
JP150  [JST-4-PTH-VERT]  233.43,42.04 90 top
JP151  [USB-B-MICRO-SMD_V03]  12.19,77.85 0 top
JP152  [1X01_ALLIGATOR_3MM_HALF]  18.41,96.27 0 top
JP153  [1X01_ALLIGATOR_3MM_HALF]  23.5,96.27 0 top
JP154  [1X01_ALLIGATOR_3MM_HALF]  33.66,96.27 0 top
JP155  [1X01_ALLIGATOR_3MM_HALF]  38.73,96.27 0 top
JP156  [1X01_ALLIGATOR_3MM_HALF]  43.81,59.44 180 top
JP157  [1X01_ALLIGATOR_3MM_HALF]  28.57,96.27 0 top
JP158  [1X01_ALLIGATOR_3MM_HALF]  23.5,59.44 180 top
JP159  [1X01_ALLIGATOR_3MM_HALF]  28.57,59.44 180 top
JP160  [JST-3-PTH-VERT]  48.77,66.8 0 top
JP161  [1X01_NO_SILK]  43.81,63.88 0 top
JP162  [1X01_NO_SILK]  28.57,91.82 0 top
JP163  [1X01_NO_SILK]  23.5,63.88 0 top
JP164  [1X01_NO_SILK]  28.57,63.88 0 top
JP165  [1X01_NO_SILK]  38.73,91.82 0 top
JP166  [1X01_NO_SILK]  33.66,91.82 0 top
JP167  [1X01_NO_SILK]  23.5,91.82 0 top
JP168  [1X01_NO_SILK]  18.41,91.82 0 top
JP169  LiPo  [JST-2-PTH]  16.51,69.6 90 top
JP170  [1X01_NO_SILK]  41.27,91.82 0 top
JP171  [1X01_ALLIGATOR_3MM_HALF]  38.73,59.44 180 top
JP172  [1X01_NO_SILK]  38.73,63.88 0 top
JP173  [1X01_ALLIGATOR_3MM_HALF]  33.66,59.44 180 top
JP174  [1X01_NO_SILK]  33.66,63.88 0 top
JP175  [1X01_ALLIGATOR_3MM_HALF]  43.81,96.27 0 top
JP176  [1X01_NO_SILK]  43.81,91.82 0 top
JP177  [1X01_ALLIGATOR_3MM_HALF]  18.41,59.44 180 top
JP178  [1X01_NO_SILK]  18.41,63.88 0 top
JP179  [1X04_NO_SILK]  11.43,84.84 90 top
JP180  [JST-4-PTH-VERT]  14.99,88.27 90 top
JP181  [USB-B-MICRO-SMD_V03]  66.8,77.85 0 top
JP182  [1X01_ALLIGATOR_3MM_HALF]  73.03,96.27 0 top
JP183  [1X01_ALLIGATOR_3MM_HALF]  78.11,96.27 0 top
JP184  [1X01_ALLIGATOR_3MM_HALF]  88.27,96.27 0 top
JP185  [1X01_ALLIGATOR_3MM_HALF]  93.34,96.27 0 top
JP186  [1X01_ALLIGATOR_3MM_HALF]  98.42,59.44 180 top
JP187  [1X01_ALLIGATOR_3MM_HALF]  83.19,96.27 0 top
JP188  [1X01_ALLIGATOR_3MM_HALF]  78.11,59.44 180 top
JP189  [1X01_ALLIGATOR_3MM_HALF]  83.19,59.44 180 top
JP190  [JST-3-PTH-VERT]  103.38,66.8 0 top
JP191  [1X01_NO_SILK]  98.42,63.88 0 top
JP192  [1X01_NO_SILK]  83.19,91.82 0 top
JP193  [1X01_NO_SILK]  78.11,63.88 0 top
JP194  [1X01_NO_SILK]  83.19,63.88 0 top
JP195  [1X01_NO_SILK]  93.34,91.82 0 top
JP196  [1X01_NO_SILK]  88.27,91.82 0 top
JP197  [1X01_NO_SILK]  78.11,91.82 0 top
JP198  [1X01_NO_SILK]  73.03,91.82 0 top
JP199  LiPo  [JST-2-PTH]  71.12,69.6 90 top
JP200  [1X01_NO_SILK]  95.89,91.82 0 top
JP201  [1X01_ALLIGATOR_3MM_HALF]  93.34,59.44 180 top
JP202  [1X01_NO_SILK]  93.34,63.88 0 top
JP203  [1X01_ALLIGATOR_3MM_HALF]  88.27,59.44 180 top
JP204  [1X01_NO_SILK]  88.27,63.88 0 top
JP205  [1X01_ALLIGATOR_3MM_HALF]  98.42,96.27 0 top
JP206  [1X01_NO_SILK]  98.42,91.82 0 top
JP207  [1X01_ALLIGATOR_3MM_HALF]  73.03,59.44 180 top
JP208  [1X01_NO_SILK]  73.03,63.88 0 top
JP209  [1X04_NO_SILK]  66.04,84.84 90 top
JP210  [JST-4-PTH-VERT]  69.6,88.27 90 top
JP211  [USB-B-MICRO-SMD_V03]  121.41,77.85 0 top
JP212  [1X01_ALLIGATOR_3MM_HALF]  127.64,96.27 0 top
JP213  [1X01_ALLIGATOR_3MM_HALF]  132.72,96.27 0 top
JP214  [1X01_ALLIGATOR_3MM_HALF]  142.88,96.27 0 top
JP215  [1X01_ALLIGATOR_3MM_HALF]  147.96,96.27 0 top
JP216  [1X01_ALLIGATOR_3MM_HALF]  153.03,59.44 180 top
JP217  [1X01_ALLIGATOR_3MM_HALF]  137.79,96.27 0 top
JP218  [1X01_ALLIGATOR_3MM_HALF]  132.72,59.44 180 top
JP219  [1X01_ALLIGATOR_3MM_HALF]  137.79,59.44 180 top
JP220  [JST-3-PTH-VERT]  157.99,66.8 0 top
JP221  [1X01_NO_SILK]  153.03,63.88 0 top
JP222  [1X01_NO_SILK]  137.79,91.82 0 top
JP223  [1X01_NO_SILK]  132.72,63.88 0 top
JP224  [1X01_NO_SILK]  137.79,63.88 0 top
JP225  [1X01_NO_SILK]  147.96,91.82 0 top
JP226  [1X01_NO_SILK]  142.88,91.82 0 top
JP227  [1X01_NO_SILK]  132.72,91.82 0 top
JP228  [1X01_NO_SILK]  127.64,91.82 0 top
JP229  LiPo  [JST-2-PTH]  125.73,69.6 90 top
JP230  [1X01_NO_SILK]  150.5,91.82 0 top
JP231  [1X01_ALLIGATOR_3MM_HALF]  147.96,59.44 180 top
JP232  [1X01_NO_SILK]  147.96,63.88 0 top
JP233  [1X01_ALLIGATOR_3MM_HALF]  142.88,59.44 180 top
JP234  [1X01_NO_SILK]  142.88,63.88 0 top
JP235  [1X01_ALLIGATOR_3MM_HALF]  153.03,96.27 0 top
JP236  [1X01_NO_SILK]  153.03,91.82 0 top
JP237  [1X01_ALLIGATOR_3MM_HALF]  127.64,59.44 180 top
JP238  [1X01_NO_SILK]  127.64,63.88 0 top
JP239  [1X04_NO_SILK]  120.65,84.84 90 top
JP240  [JST-4-PTH-VERT]  124.21,88.27 90 top
JP241  [USB-B-MICRO-SMD_V03]  176.02,77.85 0 top
JP242  [1X01_ALLIGATOR_3MM_HALF]  182.25,96.27 0 top
JP243  [1X01_ALLIGATOR_3MM_HALF]  187.32,96.27 0 top
JP244  [1X01_ALLIGATOR_3MM_HALF]  197.49,96.27 0 top
JP245  [1X01_ALLIGATOR_3MM_HALF]  202.56,96.27 0 top
JP246  [1X01_ALLIGATOR_3MM_HALF]  207.65,59.44 180 top
JP247  [1X01_ALLIGATOR_3MM_HALF]  192.41,96.27 0 top
JP248  [1X01_ALLIGATOR_3MM_HALF]  187.32,59.44 180 top
JP249  [1X01_ALLIGATOR_3MM_HALF]  192.41,59.44 180 top
JP250  [JST-3-PTH-VERT]  212.6,66.8 0 top
JP251  [1X01_NO_SILK]  207.65,63.88 0 top
JP252  [1X01_NO_SILK]  192.41,91.82 0 top
JP253  [1X01_NO_SILK]  187.32,63.88 0 top
JP254  [1X01_NO_SILK]  192.41,63.88 0 top
JP255  [1X01_NO_SILK]  202.56,91.82 0 top
JP256  [1X01_NO_SILK]  197.49,91.82 0 top
JP257  [1X01_NO_SILK]  187.32,91.82 0 top
JP258  [1X01_NO_SILK]  182.25,91.82 0 top
JP259  LiPo  [JST-2-PTH]  180.34,69.6 90 top
JP260  [1X01_NO_SILK]  205.1,91.82 0 top
JP261  [1X01_ALLIGATOR_3MM_HALF]  202.56,59.44 180 top
JP262  [1X01_NO_SILK]  202.56,63.88 0 top
JP263  [1X01_ALLIGATOR_3MM_HALF]  197.49,59.44 180 top
JP264  [1X01_NO_SILK]  197.49,63.88 0 top
JP265  [1X01_ALLIGATOR_3MM_HALF]  207.65,96.27 0 top
JP266  [1X01_NO_SILK]  207.65,91.82 0 top
JP267  [1X01_ALLIGATOR_3MM_HALF]  182.25,59.44 180 top
JP268  [1X01_NO_SILK]  182.25,63.88 0 top
JP269  [1X04_NO_SILK]  175.26,84.84 90 top
JP270  [JST-4-PTH-VERT]  178.82,88.27 90 top
JP271  [USB-B-MICRO-SMD_V03]  230.63,77.85 0 top
JP272  [1X01_ALLIGATOR_3MM_HALF]  236.85,96.27 0 top
JP273  [1X01_ALLIGATOR_3MM_HALF]  241.94,96.27 0 top
JP274  [1X01_ALLIGATOR_3MM_HALF]  252.09,96.27 0 top
JP275  [1X01_ALLIGATOR_3MM_HALF]  257.18,96.27 0 top
JP276  [1X01_ALLIGATOR_3MM_HALF]  262.25,59.44 180 top
JP277  [1X01_ALLIGATOR_3MM_HALF]  247.01,96.27 0 top
JP278  [1X01_ALLIGATOR_3MM_HALF]  241.94,59.44 180 top
JP279  [1X01_ALLIGATOR_3MM_HALF]  247.01,59.44 180 top
JP280  [JST-3-PTH-VERT]  267.21,66.8 0 top
JP281  [1X01_NO_SILK]  262.25,63.88 0 top
JP282  [1X01_NO_SILK]  247.01,91.82 0 top
JP283  [1X01_NO_SILK]  241.94,63.88 0 top
JP284  [1X01_NO_SILK]  247.01,63.88 0 top
JP285  [1X01_NO_SILK]  257.18,91.82 0 top
JP286  [1X01_NO_SILK]  252.09,91.82 0 top
JP287  [1X01_NO_SILK]  241.94,91.82 0 top
JP288  [1X01_NO_SILK]  236.85,91.82 0 top
JP289  LiPo  [JST-2-PTH]  234.95,69.6 90 top
JP290  [1X01_NO_SILK]  259.71,91.82 0 top
JP291  [1X01_ALLIGATOR_3MM_HALF]  257.18,59.44 180 top
JP292  [1X01_NO_SILK]  257.18,63.88 0 top
JP293  [1X01_ALLIGATOR_3MM_HALF]  252.09,59.44 180 top
JP294  [1X01_NO_SILK]  252.09,63.88 0 top
JP295  [1X01_ALLIGATOR_3MM_HALF]  262.25,96.27 0 top
JP296  [1X01_NO_SILK]  262.25,91.82 0 top
JP297  [1X01_ALLIGATOR_3MM_HALF]  236.85,59.44 180 top
JP298  [1X01_NO_SILK]  236.85,63.88 0 top
JP299  [1X04_NO_SILK]  229.87,84.84 90 top
JP300  [JST-4-PTH-VERT]  233.43,88.27 90 top
JP301  [USB-B-MICRO-SMD_V03]  12.19,124.08 0 top
JP302  [1X01_ALLIGATOR_3MM_HALF]  18.41,142.49 0 top
JP303  [1X01_ALLIGATOR_3MM_HALF]  23.5,142.49 0 top
JP304  [1X01_ALLIGATOR_3MM_HALF]  33.66,142.49 0 top
JP305  [1X01_ALLIGATOR_3MM_HALF]  38.73,142.49 0 top
JP306  [1X01_ALLIGATOR_3MM_HALF]  43.81,105.66 180 top
JP307  [1X01_ALLIGATOR_3MM_HALF]  28.57,142.49 0 top
JP308  [1X01_ALLIGATOR_3MM_HALF]  23.5,105.66 180 top
JP309  [1X01_ALLIGATOR_3MM_HALF]  28.57,105.66 180 top
JP310  [JST-3-PTH-VERT]  48.77,113.03 0 top
JP311  [1X01_NO_SILK]  43.81,110.11 0 top
JP312  [1X01_NO_SILK]  28.57,138.05 0 top
JP313  [1X01_NO_SILK]  23.5,110.11 0 top
JP314  [1X01_NO_SILK]  28.57,110.11 0 top
JP315  [1X01_NO_SILK]  38.73,138.05 0 top
JP316  [1X01_NO_SILK]  33.66,138.05 0 top
JP317  [1X01_NO_SILK]  23.5,138.05 0 top
JP318  [1X01_NO_SILK]  18.41,138.05 0 top
JP319  LiPo  [JST-2-PTH]  16.51,115.82 90 top
JP320  [1X01_NO_SILK]  41.27,138.05 0 top
JP321  [1X01_ALLIGATOR_3MM_HALF]  38.73,105.66 180 top
JP322  [1X01_NO_SILK]  38.73,110.11 0 top
JP323  [1X01_ALLIGATOR_3MM_HALF]  33.66,105.66 180 top
JP324  [1X01_NO_SILK]  33.66,110.11 0 top
JP325  [1X01_ALLIGATOR_3MM_HALF]  43.81,142.49 0 top
JP326  [1X01_NO_SILK]  43.81,138.05 0 top
JP327  [1X01_ALLIGATOR_3MM_HALF]  18.41,105.66 180 top
JP328  [1X01_NO_SILK]  18.41,110.11 0 top
JP329  [1X04_NO_SILK]  11.43,131.06 90 top
JP330  [JST-4-PTH-VERT]  14.99,134.49 90 top
JP331  [USB-B-MICRO-SMD_V03]  66.8,124.08 0 top
JP332  [1X01_ALLIGATOR_3MM_HALF]  73.03,142.49 0 top
JP333  [1X01_ALLIGATOR_3MM_HALF]  78.11,142.49 0 top
JP334  [1X01_ALLIGATOR_3MM_HALF]  88.27,142.49 0 top
JP335  [1X01_ALLIGATOR_3MM_HALF]  93.34,142.49 0 top
JP336  [1X01_ALLIGATOR_3MM_HALF]  98.42,105.66 180 top
JP337  [1X01_ALLIGATOR_3MM_HALF]  83.19,142.49 0 top
JP338  [1X01_ALLIGATOR_3MM_HALF]  78.11,105.66 180 top
JP339  [1X01_ALLIGATOR_3MM_HALF]  83.19,105.66 180 top
JP340  [JST-3-PTH-VERT]  103.38,113.03 0 top
JP341  [1X01_NO_SILK]  98.42,110.11 0 top
JP342  [1X01_NO_SILK]  83.19,138.05 0 top
JP343  [1X01_NO_SILK]  78.11,110.11 0 top
JP344  [1X01_NO_SILK]  83.19,110.11 0 top
JP345  [1X01_NO_SILK]  93.34,138.05 0 top
JP346  [1X01_NO_SILK]  88.27,138.05 0 top
JP347  [1X01_NO_SILK]  78.11,138.05 0 top
JP348  [1X01_NO_SILK]  73.03,138.05 0 top
JP349  LiPo  [JST-2-PTH]  71.12,115.82 90 top
JP350  [1X01_NO_SILK]  95.89,138.05 0 top
JP351  [1X01_ALLIGATOR_3MM_HALF]  93.34,105.66 180 top
JP352  [1X01_NO_SILK]  93.34,110.11 0 top
JP353  [1X01_ALLIGATOR_3MM_HALF]  88.27,105.66 180 top
JP354  [1X01_NO_SILK]  88.27,110.11 0 top
JP355  [1X01_ALLIGATOR_3MM_HALF]  98.42,142.49 0 top
JP356  [1X01_NO_SILK]  98.42,138.05 0 top
JP357  [1X01_ALLIGATOR_3MM_HALF]  73.03,105.66 180 top
JP358  [1X01_NO_SILK]  73.03,110.11 0 top
JP359  [1X04_NO_SILK]  66.04,131.06 90 top
JP360  [JST-4-PTH-VERT]  69.6,134.49 90 top
JP361  [USB-B-MICRO-SMD_V03]  121.41,124.08 0 top
JP362  [1X01_ALLIGATOR_3MM_HALF]  127.64,142.49 0 top
JP363  [1X01_ALLIGATOR_3MM_HALF]  132.72,142.49 0 top
JP364  [1X01_ALLIGATOR_3MM_HALF]  142.88,142.49 0 top
JP365  [1X01_ALLIGATOR_3MM_HALF]  147.96,142.49 0 top
JP366  [1X01_ALLIGATOR_3MM_HALF]  153.03,105.66 180 top
JP367  [1X01_ALLIGATOR_3MM_HALF]  137.79,142.49 0 top
JP368  [1X01_ALLIGATOR_3MM_HALF]  132.72,105.66 180 top
JP369  [1X01_ALLIGATOR_3MM_HALF]  137.79,105.66 180 top
JP370  [JST-3-PTH-VERT]  157.99,113.03 0 top
JP371  [1X01_NO_SILK]  153.03,110.11 0 top
JP372  [1X01_NO_SILK]  137.79,138.05 0 top
JP373  [1X01_NO_SILK]  132.72,110.11 0 top
JP374  [1X01_NO_SILK]  137.79,110.11 0 top
JP375  [1X01_NO_SILK]  147.96,138.05 0 top
JP376  [1X01_NO_SILK]  142.88,138.05 0 top
JP377  [1X01_NO_SILK]  132.72,138.05 0 top
JP378  [1X01_NO_SILK]  127.64,138.05 0 top
JP379  LiPo  [JST-2-PTH]  125.73,115.82 90 top
JP380  [1X01_NO_SILK]  150.5,138.05 0 top
JP381  [1X01_ALLIGATOR_3MM_HALF]  147.96,105.66 180 top
JP382  [1X01_NO_SILK]  147.96,110.11 0 top
JP383  [1X01_ALLIGATOR_3MM_HALF]  142.88,105.66 180 top
JP384  [1X01_NO_SILK]  142.88,110.11 0 top
JP385  [1X01_ALLIGATOR_3MM_HALF]  153.03,142.49 0 top
JP386  [1X01_NO_SILK]  153.03,138.05 0 top
JP387  [1X01_ALLIGATOR_3MM_HALF]  127.64,105.66 180 top
JP388  [1X01_NO_SILK]  127.64,110.11 0 top
JP389  [1X04_NO_SILK]  120.65,131.06 90 top
JP390  [JST-4-PTH-VERT]  124.21,134.49 90 top
JP391  [USB-B-MICRO-SMD_V03]  176.02,124.08 0 top
JP392  [1X01_ALLIGATOR_3MM_HALF]  182.25,142.49 0 top
JP393  [1X01_ALLIGATOR_3MM_HALF]  187.32,142.49 0 top
JP394  [1X01_ALLIGATOR_3MM_HALF]  197.49,142.49 0 top
JP395  [1X01_ALLIGATOR_3MM_HALF]  202.56,142.49 0 top
JP396  [1X01_ALLIGATOR_3MM_HALF]  207.65,105.66 180 top
JP397  [1X01_ALLIGATOR_3MM_HALF]  192.41,142.49 0 top
JP398  [1X01_ALLIGATOR_3MM_HALF]  187.32,105.66 180 top
JP399  [1X01_ALLIGATOR_3MM_HALF]  192.41,105.66 180 top
JP400  [JST-3-PTH-VERT]  212.6,113.03 0 top
JP401  [1X01_NO_SILK]  207.65,110.11 0 top
JP402  [1X01_NO_SILK]  192.41,138.05 0 top
JP403  [1X01_NO_SILK]  187.32,110.11 0 top
JP404  [1X01_NO_SILK]  192.41,110.11 0 top
JP405  [1X01_NO_SILK]  202.56,138.05 0 top
JP406  [1X01_NO_SILK]  197.49,138.05 0 top
JP407  [1X01_NO_SILK]  187.32,138.05 0 top
JP408  [1X01_NO_SILK]  182.25,138.05 0 top
JP409  LiPo  [JST-2-PTH]  180.34,115.82 90 top
JP410  [1X01_NO_SILK]  205.1,138.05 0 top
JP411  [1X01_ALLIGATOR_3MM_HALF]  202.56,105.66 180 top
JP412  [1X01_NO_SILK]  202.56,110.11 0 top
JP413  [1X01_ALLIGATOR_3MM_HALF]  197.49,105.66 180 top
JP414  [1X01_NO_SILK]  197.49,110.11 0 top
JP415  [1X01_ALLIGATOR_3MM_HALF]  207.65,142.49 0 top
JP416  [1X01_NO_SILK]  207.65,138.05 0 top
JP417  [1X01_ALLIGATOR_3MM_HALF]  182.25,105.66 180 top
JP418  [1X01_NO_SILK]  182.25,110.11 0 top
JP419  [1X04_NO_SILK]  175.26,131.06 90 top
JP420  [JST-4-PTH-VERT]  178.82,134.49 90 top
JP421  [USB-B-MICRO-SMD_V03]  230.63,124.08 0 top
JP422  [1X01_ALLIGATOR_3MM_HALF]  236.85,142.49 0 top
JP423  [1X01_ALLIGATOR_3MM_HALF]  241.94,142.49 0 top
JP424  [1X01_ALLIGATOR_3MM_HALF]  252.09,142.49 0 top
JP425  [1X01_ALLIGATOR_3MM_HALF]  257.18,142.49 0 top
JP426  [1X01_ALLIGATOR_3MM_HALF]  262.25,105.66 180 top
JP427  [1X01_ALLIGATOR_3MM_HALF]  247.01,142.49 0 top
JP428  [1X01_ALLIGATOR_3MM_HALF]  241.94,105.66 180 top
JP429  [1X01_ALLIGATOR_3MM_HALF]  247.01,105.66 180 top
JP430  [JST-3-PTH-VERT]  267.21,113.03 0 top
JP431  [1X01_NO_SILK]  262.25,110.11 0 top
JP432  [1X01_NO_SILK]  247.01,138.05 0 top
JP433  [1X01_NO_SILK]  241.94,110.11 0 top
JP434  [1X01_NO_SILK]  247.01,110.11 0 top
JP435  [1X01_NO_SILK]  257.18,138.05 0 top
JP436  [1X01_NO_SILK]  252.09,138.05 0 top
JP437  [1X01_NO_SILK]  241.94,138.05 0 top
JP438  [1X01_NO_SILK]  236.85,138.05 0 top
JP439  LiPo  [JST-2-PTH]  234.95,115.82 90 top
JP440  [1X01_NO_SILK]  259.71,138.05 0 top
JP441  [1X01_ALLIGATOR_3MM_HALF]  257.18,105.66 180 top
JP442  [1X01_NO_SILK]  257.18,110.11 0 top
JP443  [1X01_ALLIGATOR_3MM_HALF]  252.09,105.66 180 top
JP444  [1X01_NO_SILK]  252.09,110.11 0 top
JP445  [1X01_ALLIGATOR_3MM_HALF]  262.25,142.49 0 top
JP446  [1X01_NO_SILK]  262.25,138.05 0 top
JP447  [1X01_ALLIGATOR_3MM_HALF]  236.85,105.66 180 top
JP448  [1X01_NO_SILK]  236.85,110.11 0 top
JP449  [1X04_NO_SILK]  229.87,131.06 90 top
JP450  [JST-4-PTH-VERT]  233.43,134.49 90 top
L1  DNP  [0603]  45.09,32.7 270 top
L2  DNP  [0603]  50.16,32.7 270 top
L3  DNP  [0603]  99.69,32.7 270 top
L4  DNP  [0603]  104.78,32.7 270 top
L5  DNP  [0603]  154.31,32.7 270 top
L6  DNP  [0603]  159.38,32.7 270 top
L7  DNP  [0603]  208.91,32.7 270 top
L8  DNP  [0603]  214,32.7 270 top
L9  DNP  [0603]  263.52,32.7 270 top
L10  DNP  [0603]  268.61,32.7 270 top
L11  DNP  [0603]  45.09,78.93 270 top
L12  DNP  [0603]  50.16,78.93 270 top
L13  DNP  [0603]  99.69,78.93 270 top
L14  DNP  [0603]  104.78,78.93 270 top
L15  DNP  [0603]  154.31,78.93 270 top
L16  DNP  [0603]  159.38,78.93 270 top
L17  DNP  [0603]  208.91,78.93 270 top
L18  DNP  [0603]  214,78.93 270 top
L19  DNP  [0603]  263.52,78.93 270 top
L20  DNP  [0603]  268.61,78.93 270 top
L21  DNP  [0603]  45.09,125.16 270 top
L22  DNP  [0603]  50.16,125.16 270 top
L23  DNP  [0603]  99.69,125.16 270 top
L24  DNP  [0603]  104.78,125.16 270 top
L25  DNP  [0603]  154.31,125.16 270 top
L26  DNP  [0603]  159.38,125.16 270 top
L27  DNP  [0603]  208.91,125.16 270 top
L28  DNP  [0603]  214,125.16 270 top
L29  DNP  [0603]  263.52,125.16 270 top
L30  DNP  [0603]  268.61,125.16 270 top
LOGO1  SFE_LOGO_NAME.2_INCH  [SFE_LOGO_NAME_.2]  57.78,20.64 90 top
LOGO2  OSHW-LOGOS  [OSHW-LOGO-S]  49.53,36.7 90 top
LOGO3  SFE_LOGO_NAME.3_INCH  [SFE_LOGO_NAME_.3]  49.53,28.45 0 bottom
LOGO4  SFE_LOGO_NAME.2_INCH  [SFE_LOGO_NAME_.2]  112.39,20.64 90 top
LOGO5  OSHW-LOGOS  [OSHW-LOGO-S]  104.14,36.7 90 top
LOGO6  SFE_LOGO_NAME.3_INCH  [SFE_LOGO_NAME_.3]  104.14,28.45 0 bottom
LOGO7  SFE_LOGO_NAME.2_INCH  [SFE_LOGO_NAME_.2]  167,20.64 90 top
LOGO8  OSHW-LOGOS  [OSHW-LOGO-S]  158.75,36.7 90 top
LOGO9  SFE_LOGO_NAME.3_INCH  [SFE_LOGO_NAME_.3]  158.75,28.45 0 bottom
LOGO10  SFE_LOGO_NAME.2_INCH  [SFE_LOGO_NAME_.2]  221.62,20.64 90 top
LOGO11  OSHW-LOGOS  [OSHW-LOGO-S]  213.36,36.7 90 top
LOGO12  SFE_LOGO_NAME.3_INCH  [SFE_LOGO_NAME_.3]  213.36,28.45 0 bottom
LOGO13  SFE_LOGO_NAME.2_INCH  [SFE_LOGO_NAME_.2]  276.23,20.64 90 top
LOGO14  OSHW-LOGOS  [OSHW-LOGO-S]  267.97,36.7 90 top
LOGO15  SFE_LOGO_NAME.3_INCH  [SFE_LOGO_NAME_.3]  267.97,28.45 0 bottom
LOGO16  SFE_LOGO_NAME.2_INCH  [SFE_LOGO_NAME_.2]  57.78,66.87 90 top
LOGO17  OSHW-LOGOS  [OSHW-LOGO-S]  49.53,82.93 90 top
LOGO18  SFE_LOGO_NAME.3_INCH  [SFE_LOGO_NAME_.3]  49.53,74.68 0 bottom
LOGO19  SFE_LOGO_NAME.2_INCH  [SFE_LOGO_NAME_.2]  112.39,66.87 90 top
LOGO20  OSHW-LOGOS  [OSHW-LOGO-S]  104.14,82.93 90 top
LOGO21  SFE_LOGO_NAME.3_INCH  [SFE_LOGO_NAME_.3]  104.14,74.68 0 bottom
LOGO22  SFE_LOGO_NAME.2_INCH  [SFE_LOGO_NAME_.2]  167,66.87 90 top
LOGO23  OSHW-LOGOS  [OSHW-LOGO-S]  158.75,82.93 90 top
LOGO24  SFE_LOGO_NAME.3_INCH  [SFE_LOGO_NAME_.3]  158.75,74.68 0 bottom
LOGO25  SFE_LOGO_NAME.2_INCH  [SFE_LOGO_NAME_.2]  221.62,66.87 90 top
LOGO26  OSHW-LOGOS  [OSHW-LOGO-S]  213.36,82.93 90 top
LOGO27  SFE_LOGO_NAME.3_INCH  [SFE_LOGO_NAME_.3]  213.36,74.68 0 bottom
LOGO28  SFE_LOGO_NAME.2_INCH  [SFE_LOGO_NAME_.2]  276.23,66.87 90 top
LOGO29  OSHW-LOGOS  [OSHW-LOGO-S]  267.97,82.93 90 top
LOGO30  SFE_LOGO_NAME.3_INCH  [SFE_LOGO_NAME_.3]  267.97,74.68 0 bottom
LOGO31  SFE_LOGO_NAME.2_INCH  [SFE_LOGO_NAME_.2]  57.78,113.09 90 top
LOGO32  OSHW-LOGOS  [OSHW-LOGO-S]  49.53,129.16 90 top
LOGO33  SFE_LOGO_NAME.3_INCH  [SFE_LOGO_NAME_.3]  49.53,120.9 0 bottom
LOGO34  SFE_LOGO_NAME.2_INCH  [SFE_LOGO_NAME_.2]  112.39,113.09 90 top
LOGO35  OSHW-LOGOS  [OSHW-LOGO-S]  104.14,129.16 90 top
LOGO36  SFE_LOGO_NAME.3_INCH  [SFE_LOGO_NAME_.3]  104.14,120.9 0 bottom
LOGO37  SFE_LOGO_NAME.2_INCH  [SFE_LOGO_NAME_.2]  167,113.09 90 top
LOGO38  OSHW-LOGOS  [OSHW-LOGO-S]  158.75,129.16 90 top
LOGO39  SFE_LOGO_NAME.3_INCH  [SFE_LOGO_NAME_.3]  158.75,120.9 0 bottom
LOGO40  SFE_LOGO_NAME.2_INCH  [SFE_LOGO_NAME_.2]  221.62,113.09 90 top
LOGO41  OSHW-LOGOS  [OSHW-LOGO-S]  213.36,129.16 90 top
LOGO42  SFE_LOGO_NAME.3_INCH  [SFE_LOGO_NAME_.3]  213.36,120.9 0 bottom
LOGO43  SFE_LOGO_NAME.2_INCH  [SFE_LOGO_NAME_.2]  276.23,113.09 90 top
LOGO44  OSHW-LOGOS  [OSHW-LOGO-S]  267.97,129.16 90 top
LOGO45  SFE_LOGO_NAME.3_INCH  [SFE_LOGO_NAME_.3]  267.97,120.9 0 bottom
Q1  2.5A/30V  [SOT23-3]  24.13,25.27 180 top
Q2  MMBT2222A  [SOT23-3@1]  38.1,24.64 0 top
Q3  MMBT2222A  [SOT23-3@1]  41.91,24.64 0 top
Q4  MMBT2222A  [SOT23-3@1]  92.71,24.64 0 top
Q5  MMBT2222A  [SOT23-3@1]  96.52,24.64 0 top
Q6  2.5A/30V  [SOT23-3]  78.74,25.27 180 top
Q7  MMBT2222A  [SOT23-3@1]  147.32,24.64 0 top
Q8  MMBT2222A  [SOT23-3@1]  151.13,24.64 0 top
Q9  2.5A/30V  [SOT23-3]  133.35,25.27 180 top
Q10  MMBT2222A  [SOT23-3@1]  201.93,24.64 0 top
Q11  MMBT2222A  [SOT23-3@1]  205.74,24.64 0 top
Q12  2.5A/30V  [SOT23-3]  187.96,25.27 180 top